# Altium PCB Probe.PcbDoc (part 2 of 2)
Units mm, origin at the board's own origin, x right, y up, seen from the top; angles counter-clockwise.
Board outline 70 x 20 mm, 4 copper layers (Top, Ground, Signal/Power, Bottom), stack 1.516 mm thick; 57 components, 31 nets, 156 pads, 262 vias.
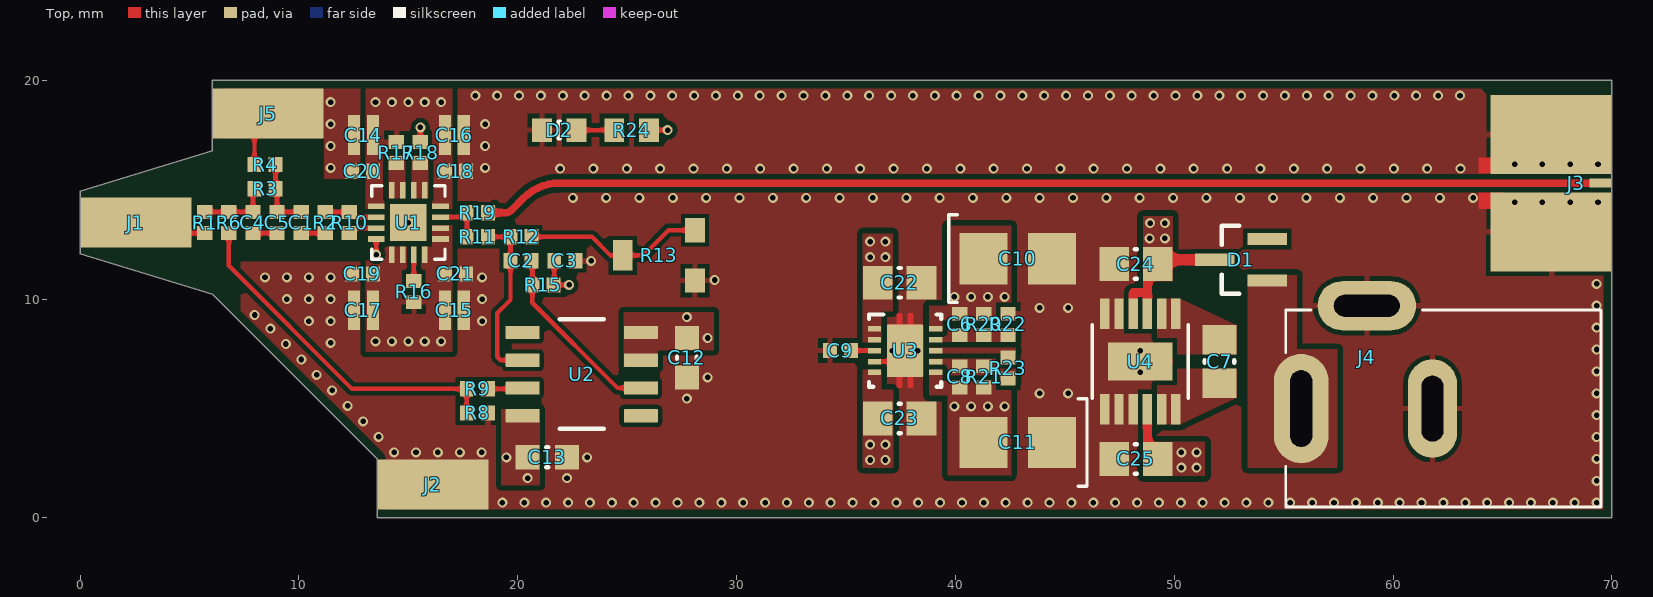
[diagram p0: Top view]

## Polygon pours and split planes (outlines as drawn) (continued)
NetC8_1 on Top "NETC8_1_L01_P094" (solid, pour order 94): 38.8,7.275 38.8,6.05 42.75,6.05 42.75,7.275
NetR23_2 on Top "NETR23_2_L01_P100" (solid, pour order 100): 38.8,7.775 38.8,7.525 42.75,7.525 42.75,7.775
VEE on Top "VEE_L01_P092" (solid, pour order 92): 39.65,5.6 38.8,5.6 38.8,6.775 39.4,6.775 39.4,6.275 42.55,6.275 42.55,1.95 39.65,1.95
VCC on Top "VCC_L01_P090" (solid, pour order 90): 39.4,9.025 39.4,8.525 38.8,8.525 38.8,9.7 39.65,9.7 39.65,13.35 42.55,13.35 42.55,9.025
VCC on Top "Top-VDD" (solid, pour order 88): 39.85,9.1
NetD1_1 on Top "Top-NetD1_1" (solid, pour order 78): 55.6,7.7 57.45,7.7 57.45,2.3 53.35,2.3 53.35,11.1 55.6,11.1
NetC7_2 on Top "Top-NetC7_2" (solid, pour order 76): 49.225,4.275 50.275,4.275 52.85,5.5 52.85,6.825 49.225,6.825
NetC7_1 on Top "Top-NetC7_1" (solid, pour order 74): 49.225,10.025 50.275,10.025 52.85,8.8 52.85,7.475 49.225,7.475
NetR17_1 on Top "NETR17_1_L01_P031" (solid, pour order 31): 14.1,14.6 14.85,14.6 14.85,16.55 14.1,16.55
VCC on Top "VCC_L01_P048" (solid, pour order 48): 26.4,6.9 26.4,7.675 27.175,7.675 28.95,7.675 28.95,9.4 24.85,9.4 24.85,6.9
VEE on Top "VEE_L01_P046" (solid, pour order 46): 19.25,4.975 21,4.975 21,1.5 19.25,1.5
NetR18_1 on Top "NETR18_1_L01_P030" (solid, pour order 30): 15.15,14.6 15.15,16.55 15.9,16.55 15.9,14.6
VEE on Signal/Power "VEE_L03_P070" (solid, pour order 70): 47.4,0 47.4,20 12.95,20 12.95,0
VCC on Signal/Power "VCC_L03_P066" (solid, pour order 66): 13.05,14.625 14.162,14.625 14.162,12.369 26.05,12.369 26.05,7.652 47.4,7.652 47.4,20 13.05,20
V+ on Signal/Power "V+_L03_P058" (solid, pour order 58): 35.75,11.575 35.75,14.2 50.45,14.2 50.45,11.575
V- on Signal/Power "V-_L03_P062" (solid, pour order 62): 35.75,0 51.475,0 51.475,3.625 35.75,3.625
GND on Bottom "GND_L04_P114" (solid, pour order 114): 13.05,14.625 14.162,14.625 14.162,11.7 7.35,11.7 7.35,0 11.033,0 74.45,0 74.45,20 11.125,20 6.05,20 6.05,17.35 11.15,17.35 11.15,15.501 13.05,15.501
GND on Ground "GND_L02_P112" (solid, pour order 112): 6.05,17.35 11.15,17.35 11.15,15.5 13.05,15.5 13.05,14.625 14.16,14.625 14.16,11.7 7.35,11.7 7.35,0 74.45,0 74.45,20 11.2,20 6.05,20

## Other copper
Top:
  rectangle net GND: 63.9,14.125 65.1,14.866
  rectangle net GND: 63.9,15.734 65.1,16.475
  pour cut-out: 13.9,14.6 13.9,12.4 16.1,12.4 16.1,14.6
  pour cut-out: 36.6,8.85 38.8,8.85 38.8,6.45 36.6,6.45
Signal/Power:
  pour cut-out: 35.491,14.2 35.491,20 48.275,20 48.275,14.2
Ground:
  region net GND: 70,16.5 70,14.1 69.6,14.1 69.6,16.5

## Silkscreen, mask and mechanical layers (free items; w line width, h text height)
Bottom Overlay:
  text "SIGNAL INPUT / MAXIMUM +/- 30 V" at 27.875,15.6 h1.02
  text "BUF802 ACTIVE PROBE / REV C / JAMES WILSON 2024" at 65.8,14.05 h1.02
  text "We" at 44.7,13.3 h6
  text "DC POWER / 9-12 V" at 53,4.9 h1.02
Top Solder:
  rectangle: 62.3,14.125 64.1,16.475
  rectangle: 68.093,14.875 68.575,15.725
Mechanical 1:
  the board outline again, w0.1

## Text inside footprints (layer, text, board x,y; h text height)
U1: Mechanical 8 "*" at 12.193,13.865 h1.27